# Altium PCB PCB1.PcbDoc (part 1 of 2)
Units mm, origin at the board's own origin, x right, y up, seen from the top; angles counter-clockwise.
Board outline 60 x 40 mm, 2 copper layers (Top Layer, Bottom Layer), stack 0.771 mm thick; 79 components, 50 nets, 240 pads, 354 vias.
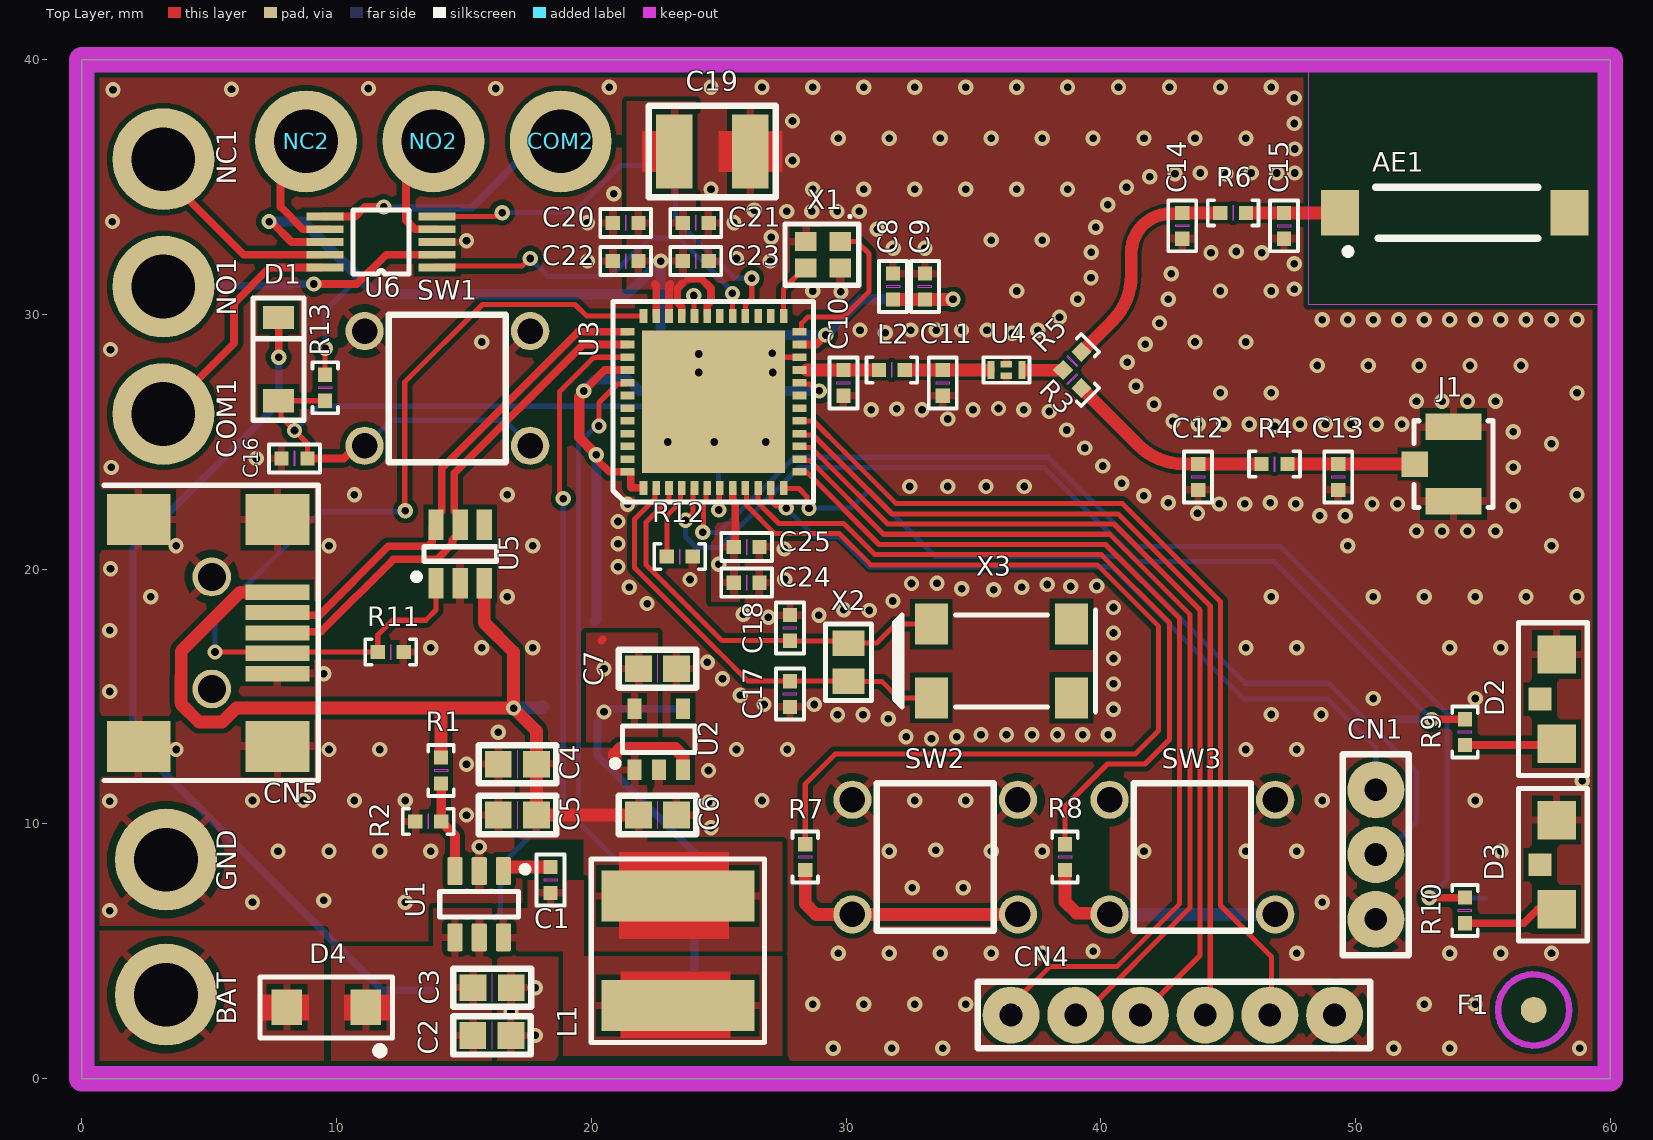
[diagram p0: Top Layer view]
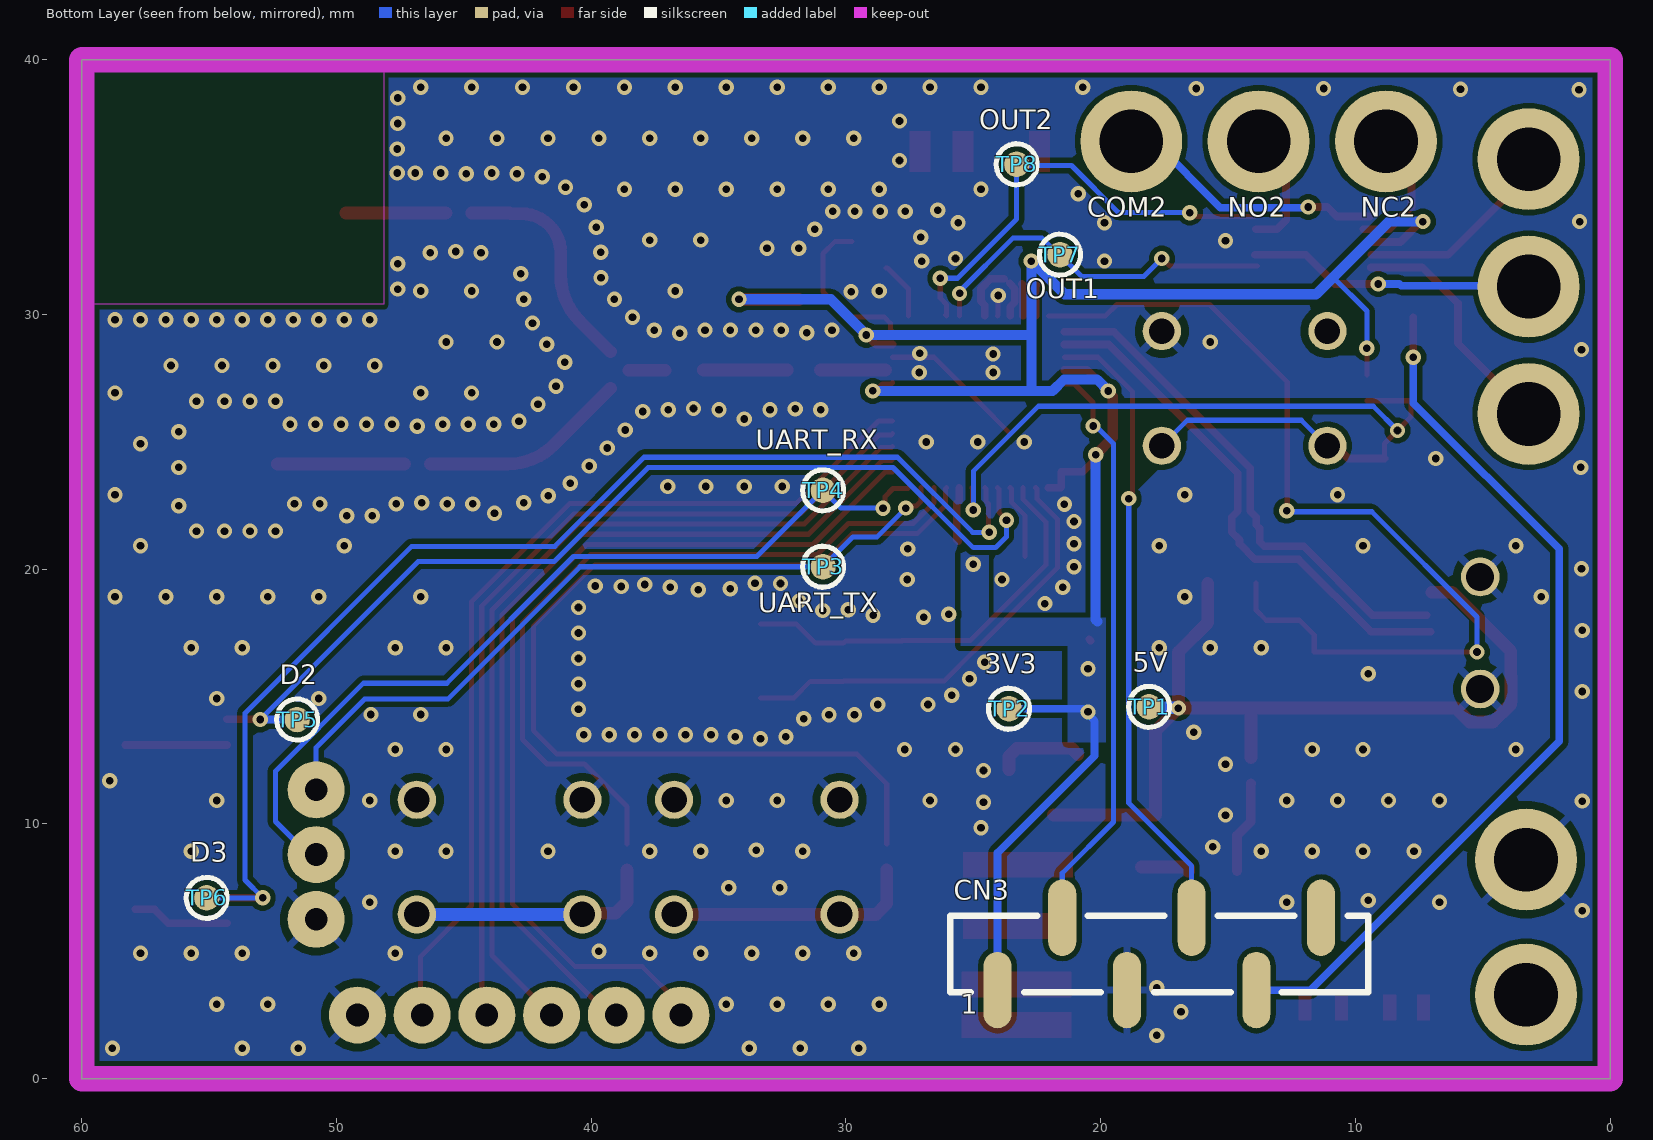
[diagram p1: Bottom Layer view, seen from below]

## Layer stack, top to bottom
Top Solder: solder mask 0.0102, Solder Resist, Dk 3.5
Top Layer: signal copper 0.0356
Dielectric 1: dielectric 0.7, FR-4, Dk 4.8
Bottom Layer: signal copper 0.0356
Bottom Solder: solder mask 0.0102, Solder Resist, Dk 3.5

## Board outline
0,0 60,0 60,40 0,40

## Design rules (kind name [scope] priority, off if disabled: settings)
Clearance Clearance_3 [InNetClass('50 ohms top/bottom') vs InPolygon] p1: gap=0.15 ignorepadtopadclearanceinfootprint=FALSE
Clearance Clearance_2 [InNet('NetC10_2')] p2: gap=0.1 ignorepadtopadclearanceinfootprint=FALSE
Clearance Clearance_1 [InComponent('R3') vs InComponent('R5')] p3: gap=0 ignorepadtopadclearanceinfootprint=FALSE
Clearance [All] p4: gap=0.2 ignorepadtopadclearanceinfootprint=FALSE
DiffPairsRouting [All] p1: maxlimit=0.2 minlimit=0.2 mostfreqgap=0.2 toplayer_minwidth=0.3 toplayer_maxwidth=0.3 toplayer_prefwidth=0.3 bottomlayer_minwidth=0.3 bottomlayer_maxwidth=0.3 bottomlayer_prefwidth=0.3 impedanceprofiledriven=TRUE impedanceprofileid={53CED034-D37F-4348-B51A-C49434C21ECC} impedanceprofilevalue=90.000000 maxuncoupledlength=12.7
HoleSize [All] p1: absolutevalues=TRUE maxlimit=2.54 minlimit=0.3 maxpercent=80.000 minpercent=20.000
HoleToHoleClearance [All] p1: gap=0.3 allowstackedmicrovias=TRUE
MinimumSolderMaskSliver [All] p1: minsoldermaskwidth=0.051
PlaneClearance PlaneClearance_1 [InNetClass('50 ohms top/bottom')] p1: clearance=0.15
PlaneClearance [All] p2: clearance=0.3
PolygonConnect [All] p1: thpad.connectstyle=Relief thpad.reliefconductorwidth=0.3 thpad.reliefentries=4 thpad.polygonreliefangle="45 Angle" thpad.airgapwidth=0.3 smdpad.connectstyle=Relief smdpad.reliefconductorwidth=0.3 smdpad.reliefentries=4 smdpad.polygonreliefangle="90 Angle" smdpad.airgapwidth=0.2 via.connectstyle=Direct via.reliefconductorwidth=0.254 via.reliefentries=4 via.polygonreliefangle="90 Angle" via.airgapwidth=0.254
RoutingVias [All] p1: holewidth=0.3 width=0.6 viastyle="Through Hole" minholewidth=0.3 minwidth=0.6 maxholewidth=5 maxwidth=10
SilkToSilkClearance [All] p1: silktosilkclearance=0.1
SilkToSolderMaskClearance [IsPad] p1: minsilkscreentomaskgap=0.051 clearancetoexposedcopper=TRUE
SolderMaskExpansion [All] p1: expansion=0.102 istentingtop=FALSE
SupplyNets "Schematic Supply Nets_3" [InNet('5V')] p1: voltage=0.000
SupplyNets "Schematic Supply Nets_2" [InNet('GND')] p2: voltage=0.000
SupplyNets "Schematic Supply Nets_1" [InNet('BAT')] p3: voltage=0.000
SupplyNets "Schematic Supply Nets" [InNet('3V3')] p4: voltage=0.000
Width Width_50 [InNetClass('50 ohms top/bottom')] p1: maxlimit=0.5 minlimit=0.5 preferedwidth=0.5 impedanceprofiledriven=TRUE impedanceprofileid={FC6B3540-095D-4B48-91D2-5ADA414D1185} impedanceprofilevalue=50.000000 minimp=50.000000 maximp=50.000000 favimp=50.000000
Width [All] p2: maxlimit=2 minlimit=0.2 preferedwidth=0.2
23 further rules are at their usual default settings.

## Classes and differential pairs
net class "50 ohms top/bottom": NetAE1_1 NetC10_2 NetC11_2 NetC12_2 NetC13_2 NetC14_2 NetR3_1
component class PowerSupply: BAT C1 C2 C3 C4 C5 C6 C7 D4 F1 GND L1 R1 R2 TP1 TP2 U1 U2
component class MCU: AE1 C8 C9 C10 C11 C12 C13 C14 C15 C16 C17 C18 C19 C20 C21 C22 C23 C24 C25 D1 J1 L2 R3 R4 R5 R6 R12 R13 SW1 U3 U4 X1 X2 X3
component class MCU_IO: CN1 CN3 CN4 CN5 COM1 COM2 D2 D3 NC1 NC2 NO1 NO2 R7 R8 R9 R10 R11 SW2 SW3 TP3 TP4 TP5 TP6 TP7 TP8 U5 U6
differential pair USB: +USB_P -USB_N

## Components (designator, comment, footprint, x,y, rotation, side; value= is the part's Value field where it differs from the comment)
AE1 "2450AT45A100E" 2450AT45A100E 53.9,34 r180 top
BAT "Terminal" 2.5mmHOLE#1 2.7,2.7 r0 top (schematic designator CN1)
C1 "0.1µF/50V" C0402 18.4,7.8 r270 top
C2 "2.2µF/50V" C0603 16.1,1.7 r180 top value=2.2uF
C3 "2.2µF/50V" C0603 16.11,3.575 r180 top value=2.2uF
C4 "22µF/10V" C0603 17.1,12.35 r0 top value=22uF
C5 "22µF/10V" C0603 17.1,10.35 r0 top value=22uF
C6 "C0603C225K4PACTU" C0603 22.6,10.35 r180 top value=2.2uF
C7 "C0603C225K4PACTU" C0603 22.6,16.1 r180 top value=2.2uF
C8 "C0402C104K4RACTU" C0402 31.85,31.1 r270 top value=100nF
C9 "GCM1555C1H101JA16D" C0402 33.1,31.1 r270 top value=100pF
C10 "GRM1555C1HR80BA01D" C0402 29.9,27.317 r90 top value=0.8pF
C11 "GRM1555C1HR30WA01D" C0402 33.8,27.317 r90 top value=0.3pF
C12 "C0402C104K4RACTU" C0402 43.825,23.625 r90 top value=100nF
C13 "C0402C104K4RACTU" C0402 49.325,23.625 r90 top value=100nF
C14 "C0402C104K4RACTU" C0402 43.2,33.483 r90 top value=100nF
C15 "C0402C104K4RACTU" C0402 47.2,33.483 r90 top value=100nF
C16 "C0402C104K4RACTU" C0402 8.35,24.35 r180 top value=100nF
C17 "C0402C120J5GACTU" C0402 27.8,15.1 r90 top value=12pF
C18 "C0402C120J5GACTU" C0402 27.8,17.7 r90 top value=12pF
C19 "CGA6M3X7S2A475K200AB" C1210 24.75,36.4 r180 top value=4.7uF
C20 "C0402C104K4RACTU" C0402 21.35,33.6 r0 top value=100nF
C21 "C0402C104K4RACTU" C0402 24.1,33.6 r180 top value=100nF
C22 "C0402C104K4RACTU" C0402 21.35,32.1 r0 top value=100nF
C23 "C0402C104K4RACTU" C0402 24.1,32.1 r180 top value=100nF
C24 "CGB2A1X6S1A105K033BC" C0402 26.1,19.475 r180 top value=1uF
C25 "CC0402KRX7R9BB103" C0402 26.1,20.875 r180 top value=10nF
CN1 "1x3 Header" 1x3Header 50.8,11.34 r0 top
CN3 "SSW-106-22-F-S-VS" SSW-106-22-F-S-VS-K-TR 17.7,4.9 r180 bottom
CN4 "90147-1306" 1x6Header 36.48,2.5 r90 top
CN5 "MUSB-05-F-AB-SM-A-K" USB 7.68,19.1 r270 top
COM1 "Terminal" 2.5mmHOLE#2 2.6,26.1 r0 top (schematic designator CN6)
COM2 "Terminal" 2.5mmHOLE#3 17.8,37.3 r270 top (schematic designator CN11)
D1 "BAT54GWJ" SOD123 7.725,28.25 r90 top
D2 "HSMS-C680" LED 57.9,14.9 r90 top
D3 "HSMS-C680" LED 57.9,8.4 r90 top
D4 "SS26L RVG" SS26LRVG 9.6,2.8 r180 top
F1 "FIDUCIAL" FID_40x120 57,2.7 r0 top
GND "Terminal" 2.5mmHOLE#4 2.7,8.1 r0 top (schematic designator CN2)
J1 "RSP-122811-01" U.FL-R-SMT-1(10) 53.85,24.133 r90 top
L1 "15µH/1.9A" SRN6045-150M 23.4,5.025 r90 top value=15uH
L2 "LQG15HS2N7S02D" L0402 31.8,27.825 r0 top value=2.7nH
NC1 "Terminal" 2.5mmHOLE#2 2.6,36.1 r0 top (schematic designator CN8)
NC2 "Terminal" 2.5mmHOLE#5 7.8,36.9 r270 top (schematic designator CN10)
NO1 "Terminal" 2.5mmHOLE#2 2.6,31.1 r0 top (schematic designator CN7)
NO2 "Terminal" 2.5mmHOLE#3 12.8,37.3 r270 top (schematic designator CN9)
R1 "RC0402FR-07118KL" R0402 14.1,12.1 r90 top value=118K
R2 "RC0402FR-0722K1L" R0402 13.6,10.1 r0 top value=22K1
R3 "RC0402JR-070RL" R0402 38.884,27.469 r315 top value=0R
R4 "RC0402JR-070RL" R0402 46.825,24.133 r0 top value=0R
R5 "RC0402JR-070RL" R0402 38.884,28.176 r45 top value=0R
R6 "RC0402JR-070RL" R0402 45.2,33.991 r0 top value=0R
R7 "RC0402FR-071KL" R0402 28.4,8.7 r90 top value=1k
R8 "RC0402FR-071KL" R0402 38.6,8.7 r90 top value=1k
R9 "RC0402JR-13330RL" R0402 54.3,13.608 r270 top value=330R
R10 "RC0402JR-13330RL" R0402 54.3,6.608 r270 top value=330R
R11 "RC0402JR-07100KL" R0402 12.125,16.75 r180 top value=100kR
R12 "RC0402FR-071KL" R0402 23.475,20.5 r0 top value=1k
R13 "RC0402JR-07100KL" R0402 9.55,27.125 r270 top value=100kR
SW1 "TS02-66-130-BK-260-LCR-D" BUTTON 14.35,27.1 r180 top
SW2 "TS02-66-130-BK-260-LCR-D" BUTTON 33.5,8.7 r180 top
SW3 "TS02-66-130-BK-260-LCR-D" BUTTON 43.6,8.7 r180 top
TP1 "TP" TP 18.1,14.6 r180 bottom
TP2 "TP" TP 23.6,14.525 r90 bottom
TP3 "TP" TP 30.9,20.1 r90 bottom
TP4 "TP" TP 30.9,23.1 r90 bottom
TP5 "TP" TP 51.55,14.1 r90 bottom
TP6 "TP" TP 55.1,7.1 r90 bottom
TP7 "TP" TP 21.6,32.35 r90 bottom
TP8 "TP" TP 23.3,35.9 r90 bottom
U1 "LMR54410" LMR54410 15.6,6.85 r270 top
U2 "AP7366-33W5-7" SOT25 21.7,12.125 r90 top
U3 "STM32WB55CCU6" WB55 24.8,26.575 r90 top
U4 "DLF162500LT-5028A1" 4PIN_LPF 36.3,27.825 r0 top
U5 "USBLC6-4SC6" SOT23-6 14.85,20.6 r90 top value=4pF
U6 "TS5A23157DGSR" VSSOP10 11.749,32.85 r180 top
X1 "NX2016SA-32M-EXS00A-CS06465" XTAL32MHZ 29.1,32.35 r180 top
X2 "NX2012SA-32.768K-STD-MUB-1" NX2012SA 30.1,16.35 r90 top
X3 "ECS-.327-12.5-17X-TR" CRI_306 36.1,16.4 r180 top

## Footprints (in the part's own frame and the unit in brackets; to place one, negate y for a bottom-side part, rotate by r counter-clockwise, add the part's x,y. Pads: shape width x height; smd on the part's side, far side on the other; paste and mask are expansions set on the pad)
1x3Header [mil]
  round 88 hole 35: 1(0,0) 2(0,-100) 3(0,-200)
  silkscreen extent -51,-256 51,55
1x6Header [mil]
  round 88 hole 35: 1(0,0) 2(0,-100) 3(0,-200) 4(0,-300) 5(0,-400) 6(0,-500)
  silkscreen extent -51,-555 51,51, body extent -50,-555 50,45, height 335
2.5mmHOLE#1 [mm]
  round 4 hole 2.5: 1(0.6,0.6)
2.5mmHOLE#2 [mm]
  round 4 hole 2.5: 1(0.6,0)
2.5mmHOLE#3 [mm]
  round 4 hole 2.5: 1(0.5,1)
2.5mmHOLE#4 [mm]
  round 4 hole 2.5: 1(0.6,0.5)
2.5mmHOLE#5 [mm]
  round 4 hole 2.5: 1(0.1,1)
4PIN_LPF [mm]
  rect 0.275x0.7 smd mask+0.05: 1(-0.612,0) 3(0.613,0)
  rect 0.45x0.245 smd mask+0.05: 2(0,0.228) 4(0,-0.228)
  silkscreen extent -0.9,-0.5 0.9,0.5, body extent -0.83,-0.39 0.82,0.45, height 0.26
2450AT45A100E [mm]
  rect 1.5x1.8 smd: 1(4.5,0) ""(-4.5,0)
  Keep-Out Layer region: 5.75,-5.9 5.75,3.6 -5.75,3.6 -5.75,-5.9
  silkscreen extent -3.25,-1 4.29,1.62, body extent -4.75,-1.02 4.75,0.98, height 1.22
BUTTON [mm]
  round 1.5 hole 1: 1(-3.25,2.25) 2(3.25,2.25) 3(-3.25,-2.25) 4(3.25,-2.25)
  silkscreen extent -2.3,-2.9 2.3,2.9, body extent -3.95,-3 3.95,3, height 13
C0402 [mil]
  rect 22x22 smd: 1(-20,0) 2(20,0)
  Top Layer keep-out region: -0.98,-10.84 0.98,-10.84 0.98,10.82 -0.98,10.82
  silkscreen extent -39,-22 39,22, body extent -21,-11 21,11, height 22
C0603 [mm]
  rect 1.05x1.05 smd: 1(-0.75,0) 2(0.75,0)
  Top Layer keep-out region: -0.01,-0.525 0.01,-0.525 0.01,0.525 -0.01,0.525
  silkscreen extent -1.53,-0.75 1.53,0.75, body extent -0.87,-0.48 0.87,0.48, height 0.88
C1210 [mm]
  rect 1.42x2.91 smd: 1(-1.49,0) 2(1.49,0)
  silkscreen extent -2.5,-1.8 2.5,1.8, body extent -1.7,-1.35 1.7,1.35, height 2.11
CRI_306 [mm]
  rect 1.3x1.6 smd: 1(2.75,1.45) 2(-2.75,1.45) 3(-2.75,-1.45) 4(2.75,-1.45)
  silkscreen extent -3.7,-2 4.2,2, body extent -3.82,-1.85 4.07,1.85, height 2.5
FID_40x120 [mil]
  round 40 smd paste-40 mask+40: 1(0,0)
  Top Layer keep-out circle w10: c0,0 r55.04
L0402 [mil]
  rect 22x22 smd: 1(-20,0) 2(20,0)
  Top Layer keep-out region: -0.98,-10.83 0.98,-10.83 0.98,10.83 -0.98,10.83
  silkscreen extent -39,-20 39,20, body extent -20,-11 20,11, height 20
LED [mm]
  rect 1.5x1.5 smd: 1(-1.75,0) 2(1.75,0)
  rect 0.9x0.9 smd: 3(0,0.65)
  silkscreen extent -3,-1.2 3,1.5, body extent -1.5,-1.51 1.5,0.5, height 1
LMR54410 [mm]
  rrect20% 1.1x0.6 smd mask+0.07: 1(-1.3,0.95) 2(-1.3,0) 3(-1.3,-0.95) 4(1.3,-0.95) 5(1.3,0) 6(1.3,0.95)
  silkscreen extent -1.5,-1.55 0.5,1.93, body extent -1.5,-1.53 1.5,1.53, height 1.45
NX2012SA [mm]
  rect 1x1.25 smd: 1(-0.75,0) 2(0.75,0)
  silkscreen extent -1.5,-0.9 1.5,0.9, body extent -1.02,-0.6 1.02,0.6, height 0.56
R0402 [mil]
  rect 22x22 smd: 1(-20,0) 2(20,0)
  Top Layer keep-out region: -1,-10.83 0.96,-10.83 0.96,10.83 -1,10.83
  silkscreen extent -39,-20 39,20, body extent -20,-10 20,10, height 14
SOD123 [mm]
  rect 0.91x1.22 smd: A(-1.635,0) K(1.635,0)
  silkscreen extent -2.4,-1 2.4,1, body extent -1.8,-0.8 1.8,0.8, height 1.21
SOT23-6 [mm]
  rect 1.2x0.6 smd: 1(-1.15,0.95) 2(-1.15,0) 3(-1.15,-0.95) 4(1.15,-0.95) 5(1.15,0) 6(1.15,0.95)
  silkscreen extent -1,-1.43 0.28,1.81, body extent -1.43,-1.46 1.49,1.46, height 1.46
SOT25 [mm]
  rect 0.8x0.55 smd: 1(0,0) 2(0,-0.95) 3(0,-1.9) 4(2.4,-1.9) 5(2.4,0)
  silkscreen extent 0.15,-2.38 1.73,0.86, body extent -0.23,-2.45 2.63,0.55, height 1.4
SRN6045-150M [mm]
  rect 2x6 smd: 1(-2.15,0) 2(2.15,0)
  silkscreen extent -3.6,-3.4 3.6,3.4, body extent -3,-3 3,3, height 4.51
SS26LRVG [mm]
  rect 1.2x1.4 smd: 1(-1.55,0) 2(1.55,0)
  silkscreen extent -2.6,-1.2 2.6,1.85, body extent -1.95,-0.95 1.95,0.95, height 1.25
SSW-106-22-F-S-VS-K-TR [mm]
  oval 1.1x3 smd paste-2: 1(-6.35,-1.42) 2(-3.81,1.42) 3(-1.27,-1.42) 4(1.27,1.42) 5(3.81,-1.42) 6(6.35,1.42)
  silkscreen extent -8.2,-1.5 8.2,1.5, body extent -7.87,-2.58 7.87,2.58, height 9.79
TP [mm]
  round 1 smd paste-1: 1(0,0)
  silkscreen extent -0.81,-0.81 0.8,0.81
U.FL-R-SMT-1(10) [mm]
  rect 1x1.05 smd: 1(0,1.525)
  rect 1.05x2.2 smd: 2(-1.46,0) 3(1.46,0)
  silkscreen extent -1.7,-1.55 1.7,1.55, body extent -1.5,-1.57 1.5,1.53, height 1.26
USB [mm]
  rect 0.6x2.5 smd mask+0.06: 1(0,0) 2(0.8,0) 3(1.6,0) 4(2.4,0) 5(3.2,0)
  rect 2x2.5 smd: 6(-2.85,0) 7(-2.85,-5.45) 8(6.05,0) 9(6.05,-5.45)
  round 1.524 hole 1.1: 10(3.8,-2.58) 11(-0.6,-2.58)
  silkscreen extent -4.2,-6.8 7.4,1.6, body extent -3.4,-8.46 6.6,1.04, height 4.14
VSSOP10 [mm]
  rect 1.45x0.3 smd mask+0.05: 1(-2.2,1) 2(-2.2,0.5) 3(-2.2,0) 4(-2.2,-0.5) 5(-2.2,-1) 6(2.2,-1) 7(2.2,-0.5) 8(2.2,0) 9(2.2,0.5) 10(2.2,1)
  silkscreen extent -1.1,-1.25 1.1,1.25, body extent -2.46,-1.5 2.46,1.5, height 1.11
WB55 [mm]
  rect 0.55x0.3 smd mask+0.06: 1(-3.375,2.75) 2(-3.375,2.25) 3(-3.375,1.75) 4(-3.375,1.25) 5(-3.375,0.75) 6(-3.375,0.25) 7(-3.375,-0.25) 8(-3.375,-0.75) 9(-3.375,-1.25) 10(-3.375,-1.75) 11(-3.375,-2.25) 12(-3.375,-2.75) 25(3.375,-2.75) 26(3.375,-2.25) 27(3.375,-1.75) 28(3.375,-1.25) 29(3.375,-0.75) 30(3.375,-0.25) 31(3.375,0.25) 32(3.375,0.75) 33(3.375,1.25) 34(3.375,1.75) 35(3.375,2.25) 36(3.375,2.75)
  rect 0.3x0.55 smd mask+0.06: 13(-2.75,-3.375) 14(-2.25,-3.375) 15(-1.75,-3.375) 16(-1.25,-3.375) 17(-0.75,-3.375) 18(-0.25,-3.375) 19(0.25,-3.375) 20(0.75,-3.375) 21(1.25,-3.375) 22(1.75,-3.375) 23(2.25,-3.375) 24(2.75,-3.375) 37(2.75,3.375) 38(2.25,3.375) 39(1.75,3.375) 40(1.25,3.375) 41(0.75,3.375) 42(0.25,3.375) 43(-0.25,3.375) 44(-0.75,3.375) 45(-1.25,3.375) 46(-1.75,3.375) 47(-2.25,3.375) 48(-2.75,3.375)
  rect 5.6x5.6 smd mask+0.06: 49(0,0)
  silkscreen extent -3.93,-3.93 3.94,3.94, body extent -3.5,-3.5 3.5,3.5, height 0.66
XTAL32MHZ [mm]
  rect 0.85x0.75 smd: 1(-0.675,-0.525) 2(0.675,-0.525) 3(0.675,0.525) 4(-0.675,0.525)
  silkscreen extent -1.4,-1.55 1.5,1.2, body extent -1,-0.8 1,0.8, height 0.47

## Part data
AE1: "Antenna Ceramic 2.2dBi Gain 2500MHz 2-Pin T/R / ANTENNA CHIP 2.4GHZ", Clock Frequency=2.5GHz, Frequency=2.45GHz, Input Power=3W, Manufacturer=Johanson, Max Operating Temperature=85°C, Min Frequency=2.4GHz, Min Operating Temperature=-40°C, Package Quantity=1000, Supplier Part Number=41T1678, Bandwidth=100MHz, Category="RF Antennas", ComponentLink1Description=https://datasheet.ciiva.com/2791/jti-antenna-2450at45a100-2006-07-2791936.pdf?src-supplier=Digikey, ComponentLink1URL=https://datasheet.ciiva.com/2791/jti-antenna-2450at45a100-2006-07-2791936.pdf?src-supplier=Digikey, ComponentLink2Description=https://datasheet.ciiva.com/24068/antenna-2450at45a100-v5-242465-24068002.pdf?src-supplier=Mouser, ComponentLink2URL=https://datasheet.ciiva.com/24068/antenna-2450at45a100-v5-242465-24068002.pdf?src-supplier=Mouser, ComponentLink3Description=https://datasheet.ciiva.com/1126/1296113-1126176.pdf?src-supplier=Newark, ComponentLink3URL=https://datasheet.ciiva.com/1126/1296113-1126176.pdf?src-supplier=Newark, ComponentLink4Description=https://datasheet.ciiva.com/6748/antenna-2450at45a100-v5-6748578.pdf?src-supplier=Newark, ComponentLink4URL=https://datasheet.ciiva.com/6748/antenna-2450at45a100-v5-6748578.pdf?src-supplier=Newark, ComponentLink5Description=https://datasheet.ciiva.com/2791/jti-antenna-2450at45a100-2006-07-2791937.pdf?src-supplier=Digikey, ComponentLink5URL=https://datasheet.ciiva.com/2791/jti-antenna-2450at45a100-2006-07-2791937.pdf?src-supplier=Digikey, ComponentLink6Description=https://datasheet.ciiva.com/2791/jti-antenna-2450at45a100-2006-07-2791938.pdf?src-supplier=Digikey, ComponentLink6URL=https://datasheet.ciiva.com/2791/jti-antenna-2450at45a100-2006-07-2791938.pdf?src-supplier=Digikey, ComponentLink7Description=https://datasheet.ciiva.com/1124/1318299-1124920.pdf?src-supplier=Element14, ComponentLink7URL=https://datasheet.ciiva.com/1124/1318299-1124920.pdf?src-supplier=Element14, Gain=1dB, Height=1.2mm, Impedance=50R, Input Impedance=50R, Length=9.5mm, Manufacturer Part Number=2450AT45A100E, Max Power Dissipation=3W, Mounting Technology="Surface Mount", Number of Bands=1, Packaging="Tape and Reel", Pins=2, Power Rating=3W, Pricing="1=0,728, 10=0,62, 25=0,572, 50=0,523, 100=0,475 (USD)", Radiation Hardening=No, Reach SVHC Compliant=No, Return Loss=-9.5dB, RoHS=Yes, RoHS Compliant=Yes, Series=-, Stock=8, Supplier=Newark, Termination=Solder, Width=2mm
C1: library part GRM155R71H104KE14J, "MLCC - 0.1µF 50V  0402 X7R ±10%", Capacitance=100nF, Case Code (Imperial)=0402, Case Code (Metric)=1005, Dielectric=X7R, Manufacturer=Murata, Max Operating Temperature=125°C, Min Operating Temperature=-55°C, Package Quantity=50000, Resistor Type=Ceramic, Supplier Part Number 1=490-13342-1-ND, Tolerance=10%, Voltage Rating=50V, .PCBChecked="Alex Batista", .SCHChecked="Alex Batista", Case/Package=0402, ComponentLink1Description=http://search.murata.co.jp/Ceramy/image/img/A01X/G101/ENG/GRM155R71H104KE14-01.pdf?src-supplier=Mouser, ComponentLink1URL=http://search.murata.co.jp/Ceramy/image/img/A01X/G101/ENG/GRM155R71H104KE14-01.pdf?src-supplier=Mouser, ComponentLink2Description=http://search.murata.co.jp/Ceramy/image/img/A01X/G101/ENG/GRM155R71H104KE14-01.pdf?src-supplier=Avnet, ComponentLink2URL=http://search.murata.co.jp/Ceramy/image/img/A01X/G101/ENG/GRM155R71H104KE14-01.pdf?src-supplier=Avnet, ComponentLink3Description=http://search.murata.co.jp/Ceramy/image/img/A01X/G101/ENG/GRM155R71H104KE14-01.pdf?src-supplier=Digi-Key, ComponentLink3URL=http://search.murata.co.jp/Ceramy/image/img/A01X/G101/ENG/GRM155R71H104KE14-01.pdf?src-supplier=Digi-Key, ComponentLink4Description=http://search.murata.co.jp/Ceramy/image/img/A01X/G101/ENG/GRM155R71H104KE14-01.pdf?src-supplier=Avnet+Europe, ComponentLink4URL=http://search.murata.co.jp/Ceramy/image/img/A01X/G101/ENG/GRM155R71H104KE14-01.pdf?src-supplier=Avnet+Europe, Height=0.5mm, Lead Free="Lead Free", Length=0.039inch, Manufacturer 1=Murata, Manufacturer Part Number=GRM155R71H104KE14J, Manufacturer Part Number 1=GRM155R71H104KE14J, Mount="Surface Mount", Packaging="Tape and Reel", Pricing 1="1=0.10000, 10=0.03300, 50=0.01780, 100=0.01460, 500=0.01040, 1000=0.00817, 2500=0.00742, 5000=0.00683 (USD)", RoHS=Yes, Stock 1=715500, Supplier 1=Digi-Key, Termination=SMD/SMT, Thickness=0.022inch, Voltage Rating (DC)=50V, Weight=0.000212oz, Width=0.5mm
C2 C3: library part GRT188R61H225KE13D, "MLCC - 2.2µF 50V  0603 X5R ±10%", Case Code (Imperial)=0603, Case Code (Metric)=1608, Dielectric=1537DielectricType, Manufacturer=Murata, Max Operating Temperature=85°C, Min Operating Temperature=-55°C, Ratings=AEC-Q200, Supplier Part Number=490-12332-1-ND, Tolerance=10%, Voltage Rating=50V, .Mounting=SMT, .PCBChecked="Alex Batista", .SCHChecked="Alex Batista", Case/Package=0603, Category="Ceramic Capacitors", ComponentLink1Description=http://www.farnell.com/datasheets/2165960.pdf?src-supplier=Farnell, ComponentLink1URL=http://www.farnell.com/datasheets/2165960.pdf?src-supplier=Farnell, ComponentLink2Description=https://datasheet.octopart.com/GRT188R61H225KE13D-Murata-datasheet-149523597.pdf?src-supplier=Farnell, ComponentLink2URL=https://datasheet.octopart.com/GRT188R61H225KE13D-Murata-datasheet-149523597.pdf?src-supplier=Farnell, ComponentLink3Description=https://datasheet.octopart.com/GRT188R61H225KE13D-Murata-datasheet-67697752.pdf?src-supplier=Element14, ComponentLink3URL=https://datasheet.octopart.com/GRT188R61H225KE13D-Murata-datasheet-67697752.pdf?src-supplier=Element14, ComponentLink4Description=https://search.murata.co.jp/Ceramy/image/img/A01X/G101/ENG/GRT188R61H225KE13-01.pdf?src-supplier=Digikey, ComponentLink4URL=https://search.murata.co.jp/Ceramy/image/img/A01X/G101/ENG/GRT188R61H225KE13-01.pdf?src-supplier=Digikey, ComponentLink5Description=http://search.murata.co.jp/Ceramy/image/img/A01X/G101/ENG/GRT188R61H225KE13-01.pdf?src-supplier=Digikey, ComponentLink5URL=http://search.murata.co.jp/Ceramy/image/img/A01X/G101/ENG/GRT188R61H225KE13-01.pdf?src-supplier=Digikey, ComponentLink6Description=https://datasheet.octopart.com/GRT188R61H225KE13D-Murata-datasheet-165579666.pdf?src-supplier=TME, ComponentLink6URL=https://datasheet.octopart.com/GRT188R61H225KE13D-Murata-datasheet-165579666.pdf?src-supplier=TME, Height=1mm, Length=0.063inch, Manufacturer 1=Murata, Manufacturer Part Number=GRT188R61H225KE13D, Manufacturer Part Number 1=GRT188R61H225KE13D, Material=4241ConductorMaterial, Mounting Technology="Surface Mount", Packaging="Cut Tape", Pricing="1=0.19, 10=0.125, 50=0.0788, 100=0.063, 500=0.04552, 1000=0.04027 (USD)", RoHS=Yes, RoHS Compliant=Yes, Series=GRT, Stock=50026, Supplier=Digikey, Thickness=0.035inch, Voltage Rating (DC)=50V, Width=0.031inch
C4 C5: library part CL10A226MP8NUNE, "MLCC - 22µF 10V 0603 X5R ±20%", Capacitor Type=Ceramic, Case/Package=0603, Manufacturer=Samsung, Max Operating Temperature=85°C, Min Operating Temperature=-55°C, Package Shape=Rectangular, Package Style=SMTMeter, Rated DC Voltage (URdc)=10V, Supplier Part Number 1=1276-1274-1-ND, Temperature Characteristics Code=X5R, Tolerance  (fill in as +-)=20%, .Mounting=SMT, .PCBChecked="Alex Batista", .SCHChecked="Alex Batista", Category="Ceramic Capacitors", ComponentLink1Description=https://datasheet.ciiva.com:443/pdfs/VipMasterIC/IC/SEMS/SEMS-S-A0008525088/SEMS-S-A0008525102-1.pdf?src-supplier=IHS+Markit, ComponentLink1URL=https://datasheet.ciiva.com:443/pdfs/VipMasterIC/IC/SEMS/SEMS-S-A0008525088/SEMS-S-A0008525102-1.pdf?src-supplier=IHS+Markit, ComponentLink2Description=https://datasheet.ciiva.com/25711/cl10a226mp8nune-25711532.pdf?src-supplier=Digikey, ComponentLink2URL=https://datasheet.ciiva.com/25711/cl10a226mp8nune-25711532.pdf?src-supplier=Digikey, ComponentLink3Description=https://datasheet.ciiva.com/26838/getdatasheetpartid-746477-26838370.pdf?src-supplier=Verical, ComponentLink3URL=https://datasheet.ciiva.com/26838/getdatasheetpartid-746477-26838370.pdf?src-supplier=Verical, Dielectric Material=Ceramic, Height=1.05mm, JESD-609 Code=e3, Length=1.6mm, Manufacturer 1=Samsung, Manufacturer Part Number=CL10A226MP8NUNE, Manufacturer Part Number 1=CL10A226MP8NUNE, Mounting Technology="Surface Mount", Multilayer=Yes, Packaging="Tape and Reel", Pins=2, Pricing 1="1=0,13, 10=0,074, 100=0,0471, 1000=0,03264 (USD)", Reach SVHC Compliant=Yes, RoHS=Yes, RoHS Compliant=Yes, Stock 1=4041118, Supplier 1=Digikey, Terminal Finish=Nickel, Termination=Wraparound, Tolerance (fill in as +-)=20%, Width=0.8mm
C6 C7: "Ceramic Capacitor, Multilayer, Ceramic, 16V, 10% +Tol, 10% -Tol, X5R, 15% TC, 2.2uF, Surface Mount, 0603", Case Code (Imperial)=0603, Case Code (Metric)=1608, Dielectric=X5R, Dielectric Material=Ceramic, Manufacturer=KEMET, Max Operating Temperature=85°C, Min Operating Temperature=-55°C, Package Quantity=1, Supplier Part Number=80-C0603C225K4P, Tolerance=10%, Voltage=16V, Case/Package=0603, Category="Ceramic Capacitors", ComponentLink1Description=https://datasheet.ciiva.com/5969/1776083-5969304.pdf?src-supplier=Farnell, ComponentLink1URL=https://datasheet.ciiva.com/5969/1776083-5969304.pdf?src-supplier=Farnell, ComponentLink2Description=https://datasheet.ciiva.com/7823/1776083-7823706.pdf?src-supplier=Element14, ComponentLink2URL=https://datasheet.ciiva.com/7823/1776083-7823706.pdf?src-supplier=Element14, Construction=Flat, Depth=0.8mm, Dissipation Factor=5%, Height=0.8mm, Lead Free=5697LeadFree, Length=1.6mm, Manufacturer Part Number=C0603C225K4PACTU, Material=Ceramic, Mounting Technology="Surface Mount", Packaging="Tape and Reel", Pins=2, Pricing="1=0,12, 10=0,059, 50=0,059, 100=0,039, 1000=0,027, 10000=0,017 (USD)", Radiation Hardening=No, Reach SVHC Compliant=No, RoHS=Yes, RoHS Compliant=Yes, Series=C, Stock=124238, Supplier=Mouser, Termination=SMD/SMT, Thickness=0.034inch, Voltage Rating=16V, Voltage Rating (DC)=16V, Width=0.031inch
C8 C12 C13 C14 C15 C16 C20 C21 C22 C23: "Multilayer Ceramic Capacitor, 0.1 uF, 16 V, ï¿½ 10%, X7R, 0402 [1005 Metric]", Case Code (Imperial)=0402, Case Code (Metric)=1005, Dielectric=X7R, Dielectric Material=Ceramic, Manufacturer=KEMET, Max Operating Temperature=125°C, Min Operating Temperature=-55°C, Supplier Part Number=80-C0402C104K4R, Tolerance=10%, Voltage=16V, Case/Package=0402, Category="Ceramic Capacitors", ComponentLink1Description=https://datasheet.ciiva.com/45846/docfinderpartnumberc0402c102k5ractu-45846919.pdf?src-supplier=Onlinecomponents.com, ComponentLink1URL=https://datasheet.ciiva.com/45846/docfinderpartnumberc0402c102k5ractu-45846919.pdf?src-supplier=Onlinecomponents.com, ComponentLink2Description=https://datasheet.ciiva.com/18192/getdatasheetpartid-385384-18192412.pdf?src-supplier=Verical, ComponentLink2URL=https://datasheet.ciiva.com/18192/getdatasheetpartid-385384-18192412.pdf?src-supplier=Verical, Depth=0.5mm, Lead Free="Lead Free", Lead Pitch=300um, Length=1mm, Manufacturer Part Number=C0402C104K4RACTU, Material=Ceramic, Mounting Technology="Surface Mount", Packaging="Tape and Reel", Pins=2, Pricing="1=0,1, 10=0,012, 50=0,012, 100=0,009, 1000=0,008, 10000=0,006 (USD)", Radiation Hardening=No, Reach SVHC Compliant=No, RoHS=Yes, RoHS Compliant=Yes, Series="SMD Comm X7R", Stock=1723997, Supplier=Mouser, Thickness=558.8um, Voltage Rating=16V, Voltage Rating (AC)=16V
C9: "Multilayer Ceramic Capacitor, 100 pF, 50 V, ï¿½ 5%, C0G (NP0), 0402 [1005 Metric]", Case Code (Imperial)=0402, Case Code (Metric)=1005, Dielectric=C0G, Manufacturer=Murata, Max Operating Temperature=125°C, Min Operating Temperature=-55°C, Package Quantity=10000, Ratings=AEC-Q200, Supplier Part Number=81-GCM1555C1H101JA6D, Temperature Coefficient=30ppm/°C, Tolerance=5%, Voltage=50V, Case/Package=0402, Category="Ceramic Capacitors", ComponentLink1Description=https://datasheet.ciiva.com/26889/getdatasheetpartid-748988-26889122.pdf?src-supplier=Verical, ComponentLink1URL=https://datasheet.ciiva.com/26889/getdatasheetpartid-748988-26889122.pdf?src-supplier=Verical, Depth=0.5mm, Height=0.5mm, Lead Free="Lead Free", Length=1mm, Manufacturer Part Number=GCM1555C1H101JA16D, Material=Ceramic, Mounting Technology="Surface Mount", Packaging="Tape and Reel", Pricing="1=0,1, 10=0,03, 50=0,03, 100=0,016, 1000=0,01, 10000=0,005 (USD)", Radiation Hardening=No, Reach SVHC Compliant=No, RoHS=Yes, RoHS Compliant=Yes, Series=GCM, Stock=954968, Supplier=Mouser, Termination=SMD/SMT, Thickness=0.022inch, Voltage Rating=50V, Voltage Rating (DC)=50V, Weight=0.000212oz, Width=0.02inch
C10: "Multilayer Ceramic Capacitor, 0.8 pF, 50 V, ï¿½ 0.1pF, C0G (NP0), 0402 [1005 Metric]", Case Code (Imperial)=0402, Case Code (Metric)=1005, Dielectric=C0G, Manufacturer=Murata, Max Operating Temperature=125°C, Min Operating Temperature=-55°C, Package Quantity=1, Supplier Part Number=81-GRM1555C1HR80BA1D, Voltage=50V, Case/Package=0402, Category="Ceramic Capacitors", ComponentLink1Description=https://datasheet.ciiva.com/6263/grm1555c1hr75ba01-01-6263972.pdf?src-supplier=Digikey, ComponentLink1URL=https://datasheet.ciiva.com/6263/grm1555c1hr75ba01-01-6263972.pdf?src-supplier=Digikey, ComponentLink2Description=https://datasheet.ciiva.com/6263/partnumbering-e-01-6263975.pdf?src-supplier=Digikey, ComponentLink2URL=https://datasheet.ciiva.com/6263/partnumbering-e-01-6263975.pdf?src-supplier=Digikey, ComponentLink3Description=https://datasheet.ciiva.com/6263/partnumbering-e-01-6263977.pdf?src-supplier=Digikey, ComponentLink3URL=https://datasheet.ciiva.com/6263/partnumbering-e-01-6263977.pdf?src-supplier=Digikey, ComponentLink4Description=https://datasheet.ciiva.com/11616/product-11616827.pdf?src-supplier=Avnet, ComponentLink4URL=https://datasheet.ciiva.com/11616/product-11616827.pdf?src-supplier=Avnet, ComponentLink5Description=https://datasheet.ciiva.com/5436/product-5436190.pdf?src-supplier=Mouser, ComponentLink5URL=https://datasheet.ciiva.com/5436/product-5436190.pdf?src-supplier=Mouser, ComponentLink6Description=https://datasheet.ciiva.com/16495/c02e-16495271.pdf?src-supplier=Future+Electronics, ComponentLink6URL=https://datasheet.ciiva.com/16495/c02e-16495271.pdf?src-supplier=Future+Electronics, Construction=Flat, Depth=0.5mm, Height=0.5mm, Lead Free="Lead Free", Length=1mm, Manufacturer Part Number=GRM1555C1HR80BA01D, Material=Ceramic, Mounting Technology="Surface Mount", Packaging="Tape and Reel", Pricing="1=0,1, 10=0,042, 50=0,042, 100=0,026, 1000=0,02, 2500=0,017, 10000=0,011, 50000=0,01 (USD)", Radiation Hardening=No, RoHS=Yes, RoHS Compliant=Yes, Series=GRM, Stock=6504, Supplier=Mouser, Termination=SMD/SMT, Thickness=0.022inch, Voltage Rating=50V, Voltage Rating (DC)=50V, Width=0.5mm
C11: "Cap Ceramic 0.3pF 50V C0G 0.05pF Pad SMD 0402 125°C T/R", Case Code (Imperial)=0402, Case Code (Metric)=1005, Dielectric=C0G, Manufacturer=Murata, Max Operating Temperature=125°C, Min Operating Temperature=-55°C, Package Quantity=1, Supplier Part Number=81-GRM1555C1HR30WA1D, Voltage=50V, Case/Package=0402, Category="Ceramic Capacitors", ComponentLink1Description=https://datasheet.ciiva.com/6264/grm1555c1hr30ba01-01-6264100.pdf?src-supplier=Digikey, ComponentLink1URL=https://datasheet.ciiva.com/6264/grm1555c1hr30ba01-01-6264100.pdf?src-supplier=Digikey, ComponentLink2Description=https://datasheet.ciiva.com/11617/product-11617602.pdf?src-supplier=Avnet, ComponentLink2URL=https://datasheet.ciiva.com/11617/product-11617602.pdf?src-supplier=Avnet, ComponentLink3Description=https://datasheet.ciiva.com/6264/partnumbering-e-01-6264101.pdf?src-supplier=Digikey, ComponentLink3URL=https://datasheet.ciiva.com/6264/partnumbering-e-01-6264101.pdf?src-supplier=Digikey, ComponentLink4Description=https://datasheet.ciiva.com/6264/partnumbering-e-01-6264102.pdf?src-supplier=Digikey, ComponentLink4URL=https://datasheet.ciiva.com/6264/partnumbering-e-01-6264102.pdf?src-supplier=Digikey, Construction=Flat, Depth=0.5mm, Height=0.5mm, Lead Free="Lead Free", Length=1mm, Manufacturer Part Number=GRM1555C1HR30WA01D, Material=Ceramic, Mounting Technology="Surface Mount", Packaging="Tape and Reel", Pricing="1=0,17, 10=0,069, 50=0,069, 100=0,042, 1000=0,037, 10000=0,026 (USD)", Radiation Hardening=No, RoHS=Yes, RoHS Compliant=Yes, Series=GRM, Stock=16063, Supplier=Mouser, Termination=SMD/SMT, Thickness=0.022inch, Voltage Rating=50V, Voltage Rating (DC)=50V, Width=0.5mm
C17 C18: "Multilayer Ceramic Capacitor, 12 pF, 50 V, ï¿½ 5%, C0G (NP0), 0402 [1005 Metric]", Case Code (Imperial)=0402, Case Code (Metric)=1005, Dielectric=C0G, Manufacturer=KEMET, Max Operating Temperature=125°C, Min Operating Temperature=-55°C, Package Quantity=1, Supplier Part Number=80-C0402C120J5G, Temperature Coefficient=30ppm/°C, Tolerance=5%, Voltage Rating=50V, Case/Package=0402, Category="Ceramic Capacitors", ComponentLink1Description=https://datasheet.ciiva.com/7392/1372242-7392447.pdf?src-supplier=Newark, ComponentLink1URL=https://datasheet.ciiva.com/7392/1372242-7392447.pdf?src-supplier=Newark, ComponentLink2Description=https://datasheet.ciiva.com/7747/kem-c1003-c0g-smd-7747451.pdf?src-supplier=Element14, ComponentLink2URL=https://datasheet.ciiva.com/7747/kem-c1003-c0g-smd-7747451.pdf?src-supplier=Element14, ComponentLink3Description=https://datasheet.ciiva.com/14600/70095383-14600717.pdf?src-supplier=Allied+Electronics, ComponentLink3URL=https://datasheet.ciiva.com/14600/70095383-14600717.pdf?src-supplier=Allied+Electronics, Construction=Flat, Depth=0.5mm, Height=0.5mm, Lead Free="Lead Free", Lead Pitch=0.3mm, Length=1mm, Manufacturer Part Number=C0402C120J5GACTU, Material=Ceramic, Mounting Technology="Surface Mount,PCB", Packaging="Tape and Reel", Pins=2, Pricing="1=0,1, 10=0,021, 50=0,021, 100=0,011, 1000=0,007, 10000=0,005 (USD)", Radiation Hardening=No, Reach SVHC Compliant=No, RoHS=Yes, RoHS Compliant=Yes, Series=C, Stock=110567, Supplier=Mouser, Termination=SMD/SMT, Thickness=0.022inch, Voltage Rating (AC)=50V, Voltage Rating (DC)=50V, Width=0.02inch
C19: "Multilayer Ceramic Capacitor, 4.7 uF, 100 V, ï¿½ 10%, X7S, 1210 [3225 Metric]", Case Code (Imperial)=1210, Case Code (Metric)=3225, Dielectric=X7S, Manufacturer=TDK, Max Operating Temperature=125°C, Min Operating Temperature=-55°C, Package Quantity=1, Ratings=AEC-Q200, Supplier Part Number=445-7005-1-ND, Tolerance=10%, Voltage Rating=100V, Case/Package=1210, Category="Ceramic Capacitors", ComponentLink1Description=https://datasheet.ciiva.com/24216/cga6m3x7s2a475k200ab-266278-24216372.pdf?src-supplier=Mouser, ComponentLink1URL=https://datasheet.ciiva.com/24216/cga6m3x7s2a475k200ab-266278-24216372.pdf?src-supplier=Mouser, ComponentLink2Description=https://datasheet.ciiva.com/26834/getdatasheetpartid-745136-26834554.pdf?src-supplier=Verical, ComponentLink2URL=https://datasheet.ciiva.com/26834/getdatasheetpartid-745136-26834554.pdf?src-supplier=Verical, ComponentLink3Description=https://datasheet.ciiva.com/8079/1807242-8079367.pdf?src-supplier=Element14, ComponentLink3URL=https://datasheet.ciiva.com/8079/1807242-8079367.pdf?src-supplier=Element14, ComponentLink4Description=https://datasheet.ciiva.com/22725/1735406-22725662.pdf?src-supplier=Element14, ComponentLink4URL=https://datasheet.ciiva.com/22725/1735406-22725662.pdf?src-supplier=Element14, ComponentLink5Description=https://datasheet.ciiva.com/28620/1735406-28620711.pdf?src-supplier=Element14, ComponentLink5URL=https://datasheet.ciiva.com/28620/1735406-28620711.pdf?src-supplier=Element14, Depth=2.5mm, Height=2mm, Lead Free="Lead Free", Length=3.2mm, Manufacturer Part Number=CGA6M3X7S2A475K200AB, Material=4241ConductorMaterial, Mounting Technology="Surface Mount", Packaging="Tape and Reel", Pricing="1=1,49, 10=0,94, 100=0,6472 (USD)", Radiation Hardening=No, Reach SVHC Compliant=No, RoHS=Yes, RoHS Compliant=Yes, Series=CGA, Stock=44060, Supplier=Digikey, Termination=SMD/SMT, Thickness=0.087inch, Voltage Rating (DC)=100V, Weight=0.000564oz, Width=0.098inch
C24: "Multilayer Ceramic Capacitor, 1 uF, 10 V, ± 10%, X6S, 0402 [1005 Metric]", Case Code (Imperial)=0402, Case Code (Metric)=1005, Manufacturer=TDK, Max Operating Temperature=105°C, Min Operating Temperature=-55°C, Supplier Part Number=810-CGB2A1X6S1A105KC, Tolerance=10%, Voltage Rating=10V, Case/Package=0402, Category="Ceramic Capacitors", ComponentLink1Description=https://product.tdk.com/info/en/catalog/spec/mlccspec_commercial_lowprofile_en.pdf?src-supplier=Digikey, ComponentLink1URL=https://product.tdk.com/info/en/catalog/spec/mlccspec_commercial_lowprofile_en.pdf?src-supplier=Digikey, ComponentLink2Description=http://product.tdk.com/en/catalog/datasheets/mlcc_commercial_lowprofile_en.pdf?src-supplier=Avnet, ComponentLink2URL=http://product.tdk.com/en/catalog/datasheets/mlcc_commercial_lowprofile_en.pdf?src-supplier=Avnet, ComponentLink3Description=https://datasheet.octopart.com/CGB2A1X6S1A105K033BC-TDK-datasheet-60278159.pdf?src-supplier=Future+Electronics, ComponentLink3URL=https://datasheet.octopart.com/CGB2A1X6S1A105K033BC-TDK-datasheet-60278159.pdf?src-supplier=Future+Electronics, Height=330um, Lead Free="Lead Free", Manufacturer Part Number=CGB2A1X6S1A105K033BC, Material=Ceramic, Mounting Technology="Surface Mount", Packaging="Cut Tape", Pricing="1=0,16, 10=0,094, 50=0,094, 100=0,057, 1000=0,041, 10000=0,028 (USD)", RoHS=Yes, RoHS Compliant=Yes, Series=CGB, Stock=11330, Supplier=Mouser
C25: "Multilayer Ceramic Capacitor, 0.01 uF, 50 V, ï¿½ 10%, X7R, 0402 [1005 Metric]", Case Code (Imperial)=0402, Case Code (Metric)=1005, Dielectric=X7R, Manufacturer=Yageo, Max Operating Temperature=125°C, Min Operating Temperature=-55°C, Package Quantity=1, Supplier Part Number=8570871, Temperature Coefficient=30ppm/°C, Tolerance=10%, Voltage=50V, Case/Package=0402, Category="Ceramic Capacitors", ComponentLink1Description=https://datasheet.ciiva.com/11788/0900766b8079c870-11788375.pdf?src-supplier=Rs, ComponentLink1URL=https://datasheet.ciiva.com/11788/0900766b8079c870-11788375.pdf?src-supplier=Rs, ComponentLink2Description=https://datasheet.ciiva.com/26862/getdatasheetpartid-138248-26862642.pdf?src-supplier=Verical, ComponentLink2URL=https://datasheet.ciiva.com/26862/getdatasheetpartid-138248-26862642.pdf?src-supplier=Verical, ComponentLink3Description=https://datasheet.ciiva.com/176/mlccorderingcode-176349.pdf?src-supplier=Digikey, ComponentLink3URL=https://datasheet.ciiva.com/176/mlccorderingcode-176349.pdf?src-supplier=Digikey, ComponentLink4Description=https://datasheet.ciiva.com/176/mlccorderingcode-176350.pdf?src-supplier=Digikey, ComponentLink4URL=https://datasheet.ciiva.com/176/mlccorderingcode-176350.pdf?src-supplier=Digikey, ComponentLink5Description=https://datasheet.ciiva.com/176/mlccorderingcode-176348.pdf?src-supplier=Digikey, ComponentLink5URL=https://datasheet.ciiva.com/176/mlccorderingcode-176348.pdf?src-supplier=Digikey, ComponentLink6Description=https://datasheet.ciiva.com/7978/1489800-7978093.pdf?src-supplier=Element14, ComponentLink6URL=https://datasheet.ciiva.com/7978/1489800-7978093.pdf?src-supplier=Element14, ComponentLink7Description=https://datasheet.ciiva.com/28450/1489800-28450377.pdf?src-supplier=Element14, ComponentLink7URL=https://datasheet.ciiva.com/28450/1489800-28450377.pdf?src-supplier=Element14, Depth=0.5mm, Halogen Free=5694HalogenFree, Height=0.5mm, Lead Free="Lead Free", Length=1mm, Manufacturer Part Number=CC0402KRX7R9BB103, Material=Ceramic, Mounting Technology="Surface Mount", Packaging="Tape and Reel", Pricing="10000=0,0016, 40000=0,0015, 150000=0,0015, 300000=0,0014, 750000=0,0014 (USD)", Radiation Hardening=No, Reach SVHC Compliant=No, RoHS=Yes, RoHS Compliant=Yes, Series=CC, Stock=21800000, Supplier="Future Electronics", Termination=SMD/SMT, Thickness=0.022inch, Voltage Rating=50V, Voltage Rating (DC)=50V, Width=0.02inch
CN3: "Conn Socket Strip SKT 6 POS 2.54mm Solder ST SMD Tube", Color=Black, Contact Resistance=10mR, Manufacturer=Samtec, Max Current Rating=3A, Max Operating Temperature=125°C, Min Operating Temperature=-55°C, Supplier Part Number 1=200-SSW10622FSVS, Category=Connectors, ComponentLink1Description="Mouser Page", ComponentLink1URL=https://br.mouser.com/ProductDetail/Samtec/SSW-106-22-F-S-VS?qs=sGAEpiMZZMvffgRu4KC1RxM6nKwEP14AemsEUlRUVAFQwg4ur6pCqw%3D%3D, ComponentLink2Description=Datasheet, ComponentLink2URL=https://br.mouser.com/datasheet/2/527/ssw_sm-1370305.pdf, ComponentLink3Description="Samtec Page", ComponentLink3URL=https://www.samtec.com/products/ssw-106-22-f-s-vs, Contact Material=Bronze, Contact Plating=Gold, Depth=2.41mm, Gender=Female, Housing Color=Black, Housing Material=Polymer, Length=15.75mm, Manufacturer Part Number=SSW-106-22-F-S-VS, Mating Cycles=100, Number of Contacts=6, Number of Rows=1, Orientation=Straight, Packaging=Bulk, Pitch=2.54mm, Pricing 1="1=1.41, 10=1.18, 50=1.18, 100=0.872, 250=0.785, 500=0.698, 1000=0.633, 2500=0.611, 5000=0.556, 10000=0.545 (USD)", Radiation Hardening=No, Stock 1=0, Supplier 1=Mouser, Termination=Solder
CN4: "Header Connector, pcb Mount, plug, 6 Contacts, skt, 0.1 Pitch, pc Tail Terminal", Color=Black, Current Rating=3A, Manufacturer=Molex, Max Operating Temperature=125°C, Min Operating Temperature=-55°C, Package Quantity=2880, Supplier Part Number=0901471306-ND, Voltage Rating=350V, Category="Headers and Wire Housings", ComponentLink1Description=https://datasheet.ciiva.com/13558/0901471306-pcb-receptacles-176889-13558073.pdf?src-supplier=Mouser, ComponentLink1URL=https://datasheet.ciiva.com/13558/0901471306-pcb-receptacles-176889-13558073.pdf?src-supplier=Mouser, ComponentLink2Description=https://datasheet.ciiva.com/10085/0901471306-pcb-receptacles-10085019.pdf?src-supplier=Avnet, ComponentLink2URL=https://datasheet.ciiva.com/10085/0901471306-pcb-receptacles-10085019.pdf?src-supplier=Avnet, Connector Type=Receptacle, Contact Material=Bronze, Contact Plating=Gold, Depth=2.54mm, Housing Color=Black, Housing Material=Polyester, Length=15.24mm, Manufacturer Part Number=90147-1306, Number of Circuits=5, Number of Contacts=6, Number of Positions=6, Number of Rows=1, Orientation=Vertical, Packaging=Rail/Tube, Pitch=2.54mm, Plating=Tin, Pricing="2880=1,37004 (USD)", Reach SVHC Compliant=4188SVHC, RoHS=Yes, RoHS Compliant=Yes, Series=90147, Supplier=Digikey, Termination="Through Hole"
CN5: "\"Mini USB 2.0 Interface\"", Manufacturer=Samtec, Supplier Part Number=612-MUSB-05-F-AB-SM-A-K-ND, Category=Connectors, ComponentLink1Description=https://datasheet.octopart.com/MUSB-05-F-AB-SM-A-K-Samtec-datasheet-151555050.pdf?src-supplier=Sager+Electronics, ComponentLink1URL=https://datasheet.octopart.com/MUSB-05-F-AB-SM-A-K-Samtec-datasheet-151555050.pdf?src-supplier=Sager+Electronics, ComponentLink2Description=https://datasheet.octopart.com/MUSB-05-F-AB-SM-A-K-Samtec-datasheet-97180724.pdf?src-supplier=Samtec, ComponentLink2URL=https://datasheet.octopart.com/MUSB-05-F-AB-SM-A-K-Samtec-datasheet-97180724.pdf?src-supplier=Samtec, ComponentLink3Description=https://datasheet.octopart.com/MUSB-05-F-AB-SM-A-K-Samtec-datasheet-129014306.pdf?src-supplier=Electro+Sonic, ComponentLink3URL=https://datasheet.octopart.com/MUSB-05-F-AB-SM-A-K-Samtec-datasheet-129014306.pdf?src-supplier=Electro+Sonic, Manufacturer Part Number=MUSB-05-F-AB-SM-A-K, Pricing="1=1,56 (USD)", RoHS=No, RoHS Compliant=No, Supplier=Digikey
D1: "Schottky Diode, Sngl, 30V, 0.2A, Sod-123 Rohs Compliant: Yes", Manufacturer=Nexperia, Supplier Part Number=841-BAT54GWJ, Category="Schottky Diodes", ComponentLink1Description=https://datasheet.octopart.com/BAT54GWJ-Nexperia-datasheet-82522515.pdf?src-supplier=Future+Electronics, ComponentLink1URL=https://datasheet.octopart.com/BAT54GWJ-Nexperia-datasheet-82522515.pdf?src-supplier=Future+Electronics, Manufacturer Part Number=BAT54GWJ, Pricing="1=0,1, 10=0,069, 50=0,069, 100=0,036, 1000=0,029, 10000=0,022 (USD)", RoHS=Yes, RoHS Compliant=Yes, Stock=282728, Supplier=Mouser
D2 D3: "LED Uni-Color Red 636nm 2-Pin Chip LED T/R", Case/Package=SMD/SMT, Color=Red, Forward Current=20mA, Forward Voltage=2V, Lens Color=Colorless, Manufacturer="Broadcom Avago", Max Operating Temperature=85°C, Min Operating Temperature=-40°C, Package Quantity=3000, Power Dissipation=65mW, Reverse Voltage=5V, Supplier Part Number=516-HSMS-C680CT-ND, Category=LEDs, ComponentLink1Description=http://components.arrow.com/part/dataview/42989512S8356275N7786?src-supplier=Arrow+Electronics, ComponentLink1URL=http://components.arrow.com/part/dataview/42989512S8356275N7786?src-supplier=Arrow+Electronics, ComponentLink2Description=https://docs.broadcom.com/docs/AV02-0481EN?src-supplier=Digikey, ComponentLink2URL=https://docs.broadcom.com/docs/AV02-0481EN?src-supplier=Digikey, ComponentLink3Description=http://www.avagotech.com/docs/AV02-0481EN?src-supplier=Avnet, ComponentLink3URL=http://www.avagotech.com/docs/AV02-0481EN?src-supplier=Avnet, ComponentLink4Description=http://www.avagotech.com/docs/AV02-0481EN?src-supplier=Mouser, ComponentLink4URL=http://www.avagotech.com/docs/AV02-0481EN?src-supplier=Mouser, Depth=1mm, Dominant Wavelength=621nm, Height=1mm, Illumination Color=Red, Lead Free="Lead Free", Length=3mm, Lens Style=Diffused,Colorless,Rectangular, Lens Transparency=Clear, Luminous Intensity=5.1mcd, Manufacturer Part Number=HSMS-C680, Mounting Technology="Surface Mount", Number of Elements=1, Number of LEDs=1, Packaging="Tape and Reel", Pins=2, Power Rating=65mW, Pricing="1=0,41, 10=0,278, 100=0,1982, 500=0,16192, 1000=0,14996 (USD)", Radiation Hardening=No, RoHS=Yes, RoHS Compliant=Yes, Series=-, Stock=32975, Supplier=Digikey, Test Current=20mA, Viewing Angle=125°, Wavelength=621nm, Width=1mm
D4: "DIODE - Schottky 60V 2A 2-Pin Sub SMA T/R", Manufacturer="Taiwan Semiconductor", Supplier Part Number=SS26LRVGCT-ND, .Mouting=SMT, .PCBChecked="Alex Batista", .SCHChecked="Alex Batista", Manufacturer 1="Taiwan Semiconductor", Manufacturer Part Number="SS26L RVG", Manufacturer Part Number 1="SS26L RVG", Pricing="1=0.66, 10=0.578 (USD)", RoHS=Yes, RoHS Compliant=Yes, Stock=38, Supplier=Digi-Key
J1: "RF MHF Connector, 1 Contact(s), Male, Board Mount, Surface Mount Terminal, Receptacle", Case/Package=SMD/SMT, Clock Frequency=6GHz, Dielectric Material=Polymer, Manufacturer=Samtec, Max Operating Temperature=90°C, Min Operating Temperature=-40°C, Operating Frequency="0 to 6 GHz", Supplier Part Number=612-RSP-122811-01CT-ND, Voltage Rating=60V, Body Material=Bronze, Category="RF / Coaxial Connectors", ComponentLink1Description=https://media.digikey.com/pdf/Data%20Sheets/Samtec/RSP-122811-01_dwg.pdf?src-supplier=Digikey, ComponentLink1URL=https://media.digikey.com/pdf/Data%20Sheets/Samtec/RSP-122811-01_dwg.pdf?src-supplier=Digikey, ComponentLink2Description=http://components.arrow.com/part/dataview/44251978S9204898N1004?src-supplier=Arrow+Electronics, ComponentLink2URL=http://components.arrow.com/part/dataview/44251978S9204898N1004?src-supplier=Arrow+Electronics, ComponentLink3Description=http://www.samtec.com/documents/webfiles/CPDF/rsp-122811-02.pdf?src-supplier=Avnet, ComponentLink3URL=http://www.samtec.com/documents/webfiles/CPDF/rsp-122811-02.pdf?src-supplier=Avnet, Connector Type="Receptacle,Male Pin", Contact Material=Bronze, Depth=3mm, Fastening Type=SNAP-ON, Gender=Female, Impedance=50R, Length=3.1mm, Manufacturer Part Number=RSP-122811-01, Mounting Technology="Surface Mount", Number of Contacts=1NUMBER, Number of Ports=1, Orientation=Straight, Packaging=Strip, Pricing="1=1,1, 10=0,936, 25=0,8772, 50=0,8352, 100=0,7952, 250=0,7454, 500=0,70978, 1000=0,67589, 2500=0,6426 (USD)", Radiation Hardening=No, RoHS=Yes, RoHS Compliant=Yes, Series=-, Stock=8691, Supplier=Digikey, Termination=Solder
L1: library part SRN6045-150M, "IND - 15µH Semi-Shielded 1.9 A 95.8mOhm", Case/Package=Nonstandard, Current Rating=1.9A, DC Resistance (DCR)=95.8mR, Inductance Tolerance=20%, Manufacturer=Bourns, Max Operating Temperature=125°C, Min Operating Temperature=-40°C, Package Quantity=1000, Saturation Current=2.3A, Self Resonant Frequency=13MHz, Supplier Part Number=SRN6045-150MCT-ND, Test Frequency=100kHz, .Mouting=SMT, .PCBChecked="Alex Batista", .SCHChecked="Alex Batista", Category="Fixed Inductors", ComponentLink1Description=https://datasheet.ciiva.com/5986/1705518-5986195.pdf?src-supplier=Farnell, ComponentLink1URL=https://datasheet.ciiva.com/5986/1705518-5986195.pdf?src-supplier=Farnell, ComponentLink2Description=https://datasheet.ciiva.com/11802/0900766b80fe1f3e-11802573.pdf?src-supplier=Rs, ComponentLink2URL=https://datasheet.ciiva.com/11802/0900766b80fe1f3e-11802573.pdf?src-supplier=Rs, ComponentLink3Description=https://datasheet.ciiva.com/4954/srn6045-70649-4954231.pdf?src-supplier=Mouser, ComponentLink3URL=https://datasheet.ciiva.com/4954/srn6045-70649-4954231.pdf?src-supplier=Mouser, ComponentLink4Description=https://datasheet.ciiva.com/8512/srn6045-8512989.pdf?src-supplier=Avnet, ComponentLink4URL=https://datasheet.ciiva.com/8512/srn6045-8512989.pdf?src-supplier=Avnet, ComponentLink5Description=https://datasheet.ciiva.com/1056/srn6045-1056106.pdf?src-supplier=Digi-Key, ComponentLink5URL=https://datasheet.ciiva.com/1056/srn6045-1056106.pdf?src-supplier=Digi-Key, ComponentLink6Description=https://datasheet.ciiva.com/1056/srn6045-1056107.pdf?src-supplier=Digi-Key, ComponentLink6URL=https://datasheet.ciiva.com/1056/srn6045-1056107.pdf?src-supplier=Digi-Key, ComponentLink7Description=https://datasheet.ciiva.com/1056/srn6045-1056108.pdf?src-supplier=Digi-Key, ComponentLink7URL=https://datasheet.ciiva.com/1056/srn6045-1056108.pdf?src-supplier=Digi-Key, ComponentLink8Description=https://datasheet.ciiva.com/17113/70231653-17113165.pdf?src-supplier=Allied+Electronics, ComponentLink8URL=https://datasheet.ciiva.com/17113/70231653-17113165.pdf?src-supplier=Allied+Electronics, Core Material=Ferrite, Depth=6mm, Height=4.5mm, Height - Seated (Max)=0.177inch, Length=6mm, Manufacturer 1=Bourns, Manufacturer Part Number=SRN6045-150M, Manufacturer Part Number 1=SRN6045-150M, Max DC Current=1.9A, Mounting Technology="Surface Mount", Packaging="Tape and Reel", Pins=2, Pricing="1=0.57, 10=0.499, 25=0.464, 50=0.3924, 100=0.3568, 250=0.33536, 500=0.2997 (USD)", Reach SVHC Compliant=No, RMS Current (Irms)=1.9A, RoHS=Yes, RoHS Compliant=Yes, Series=SRN6045, Shielding=Shielded, Stock=65513, Supplier=Digi-Key, Termination=SMD/SMT, Tolerance=20%, Weight=0.027725oz, Width=6mm